# Altium PCB Template2.PcbDoc (part 1 of 2)
Units mm, origin at the board's own origin, x right, y up, seen from the top; angles counter-clockwise.
Board outline 69.9 x 99.85 mm, 4 copper layers (Top Layer, InternalGND, Internal3V3, Bottom Layer), stack 1.563 mm thick; 143 components, 104 nets, 478 pads, 688 vias.
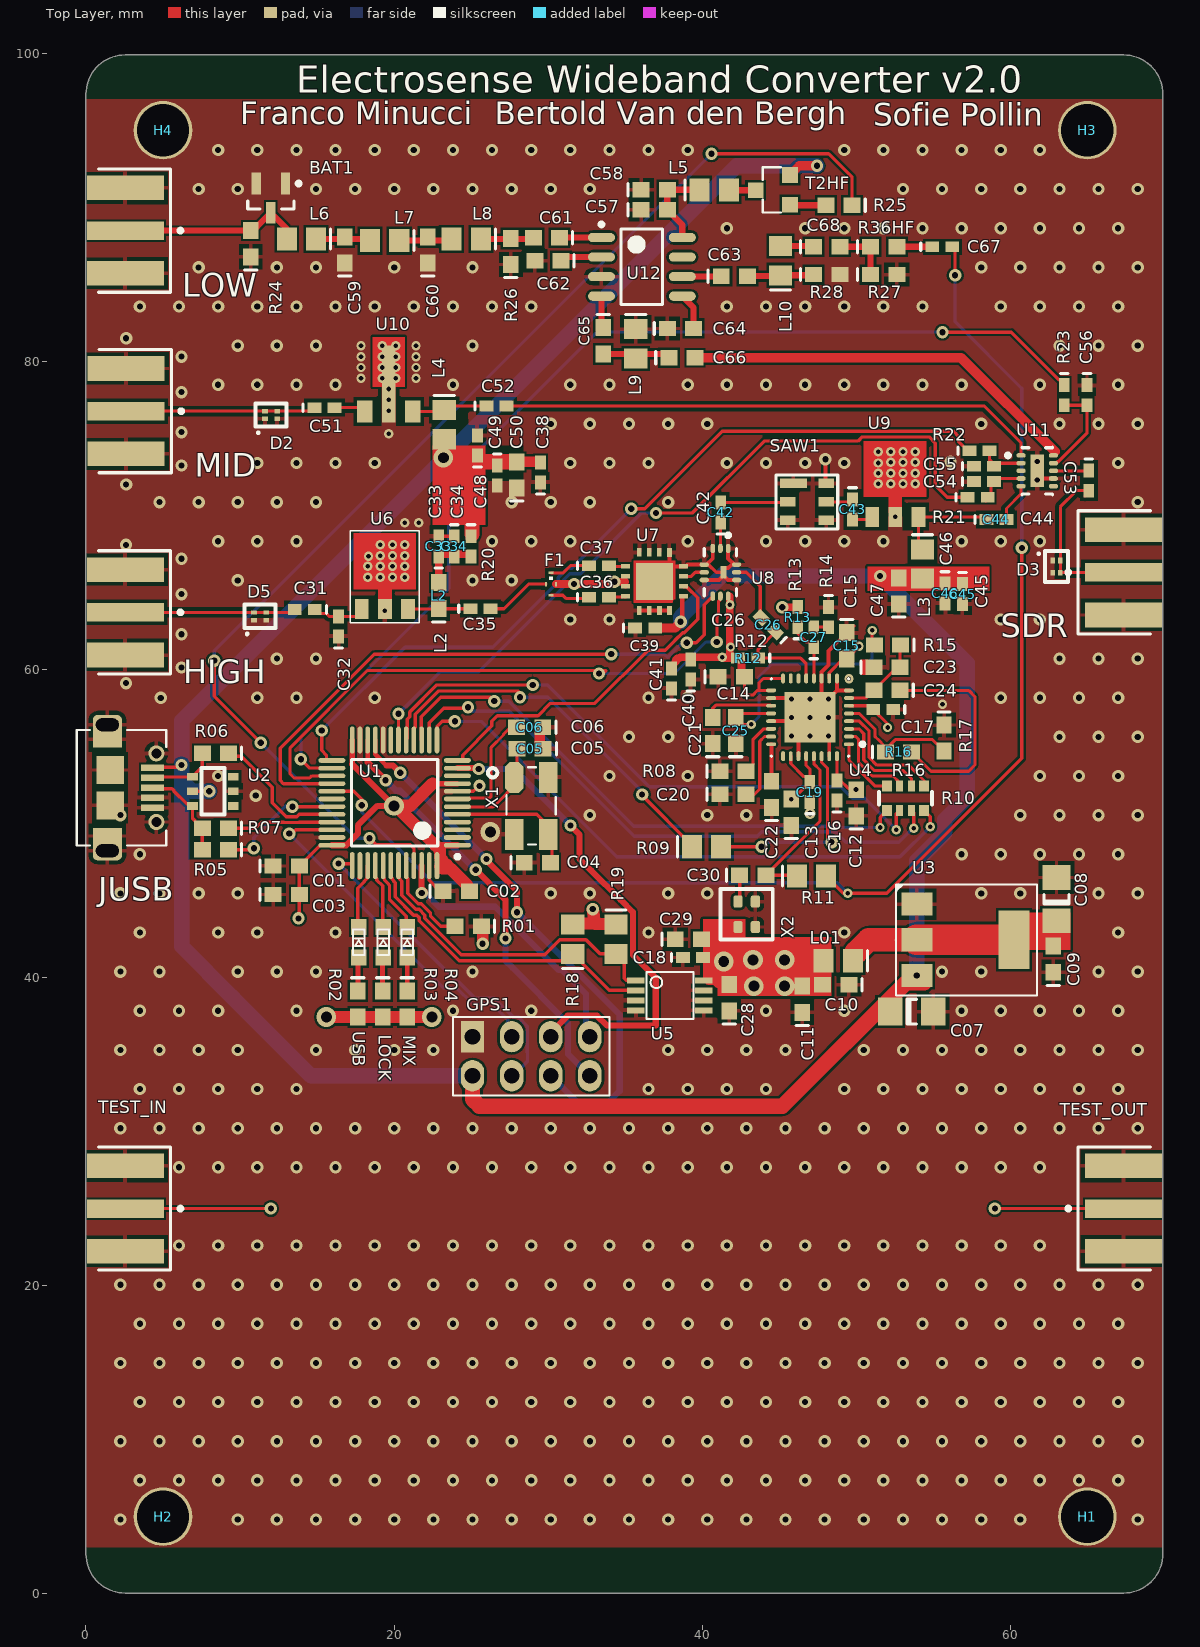
[diagram p0: Top Layer view]
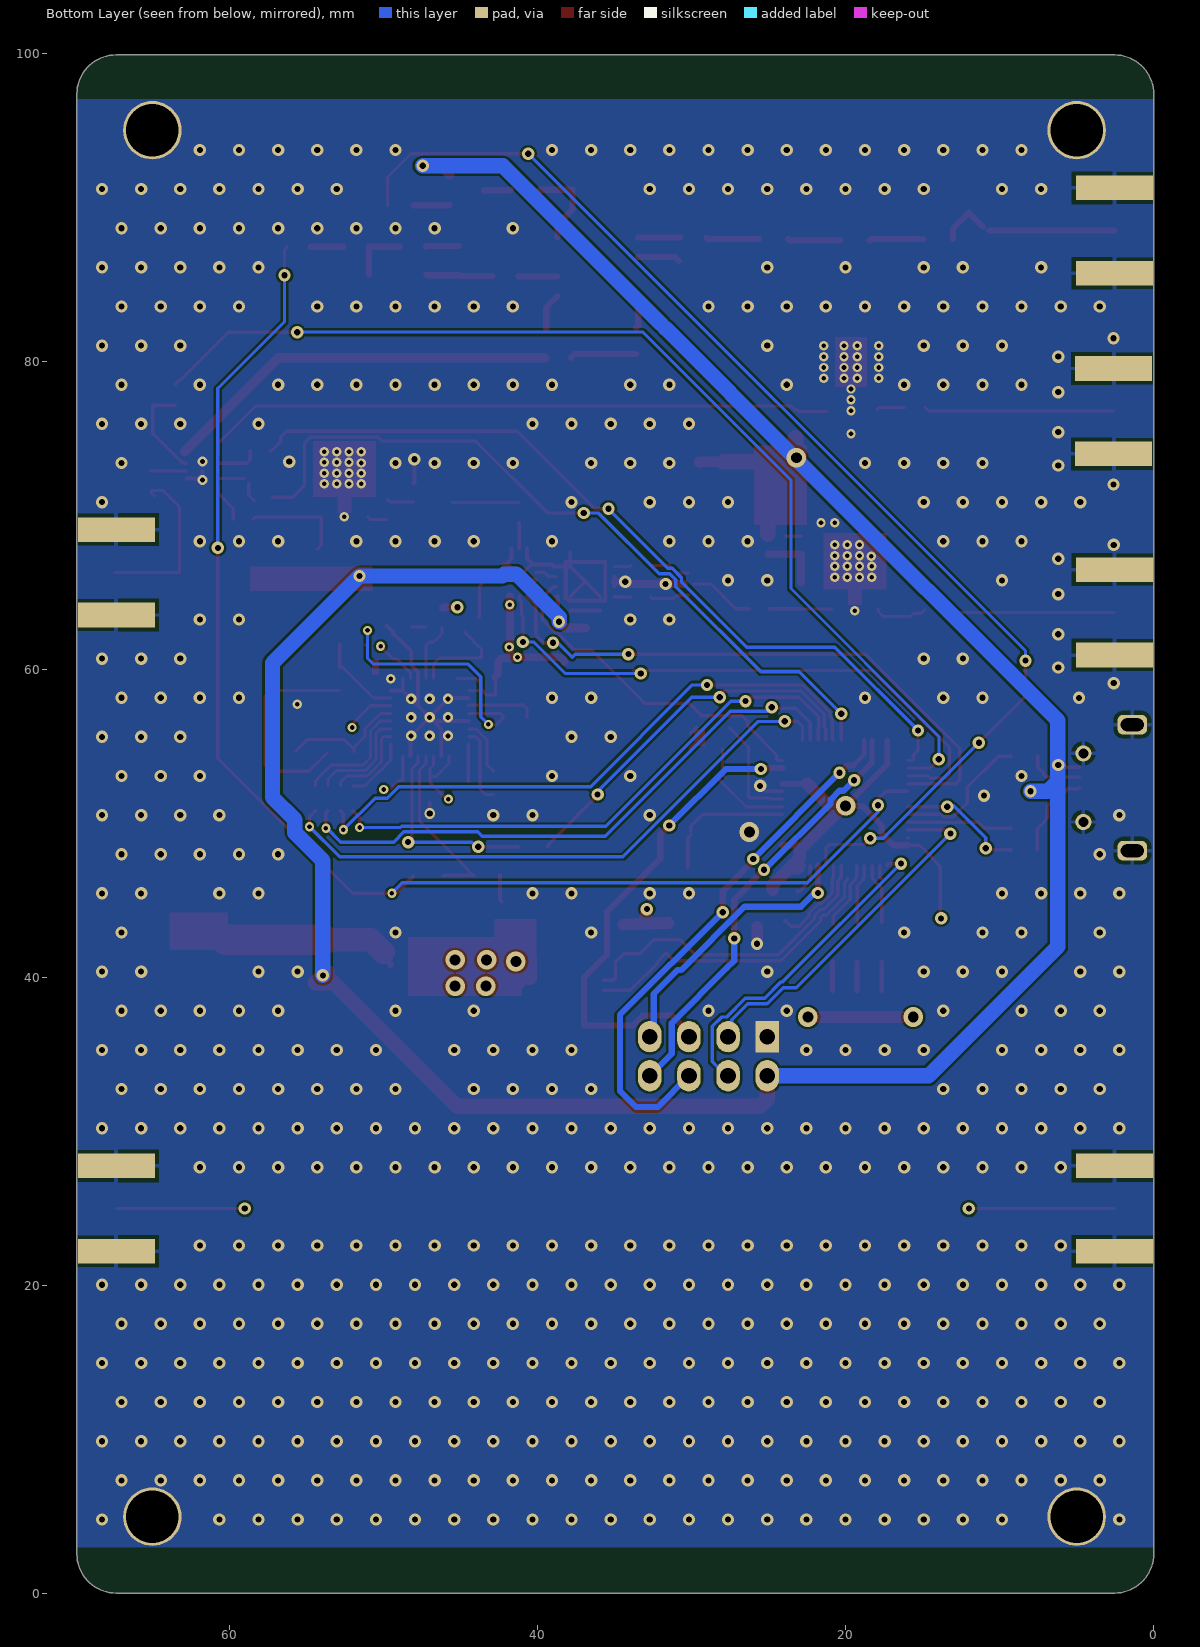
[diagram p1: Bottom Layer view, seen from below]
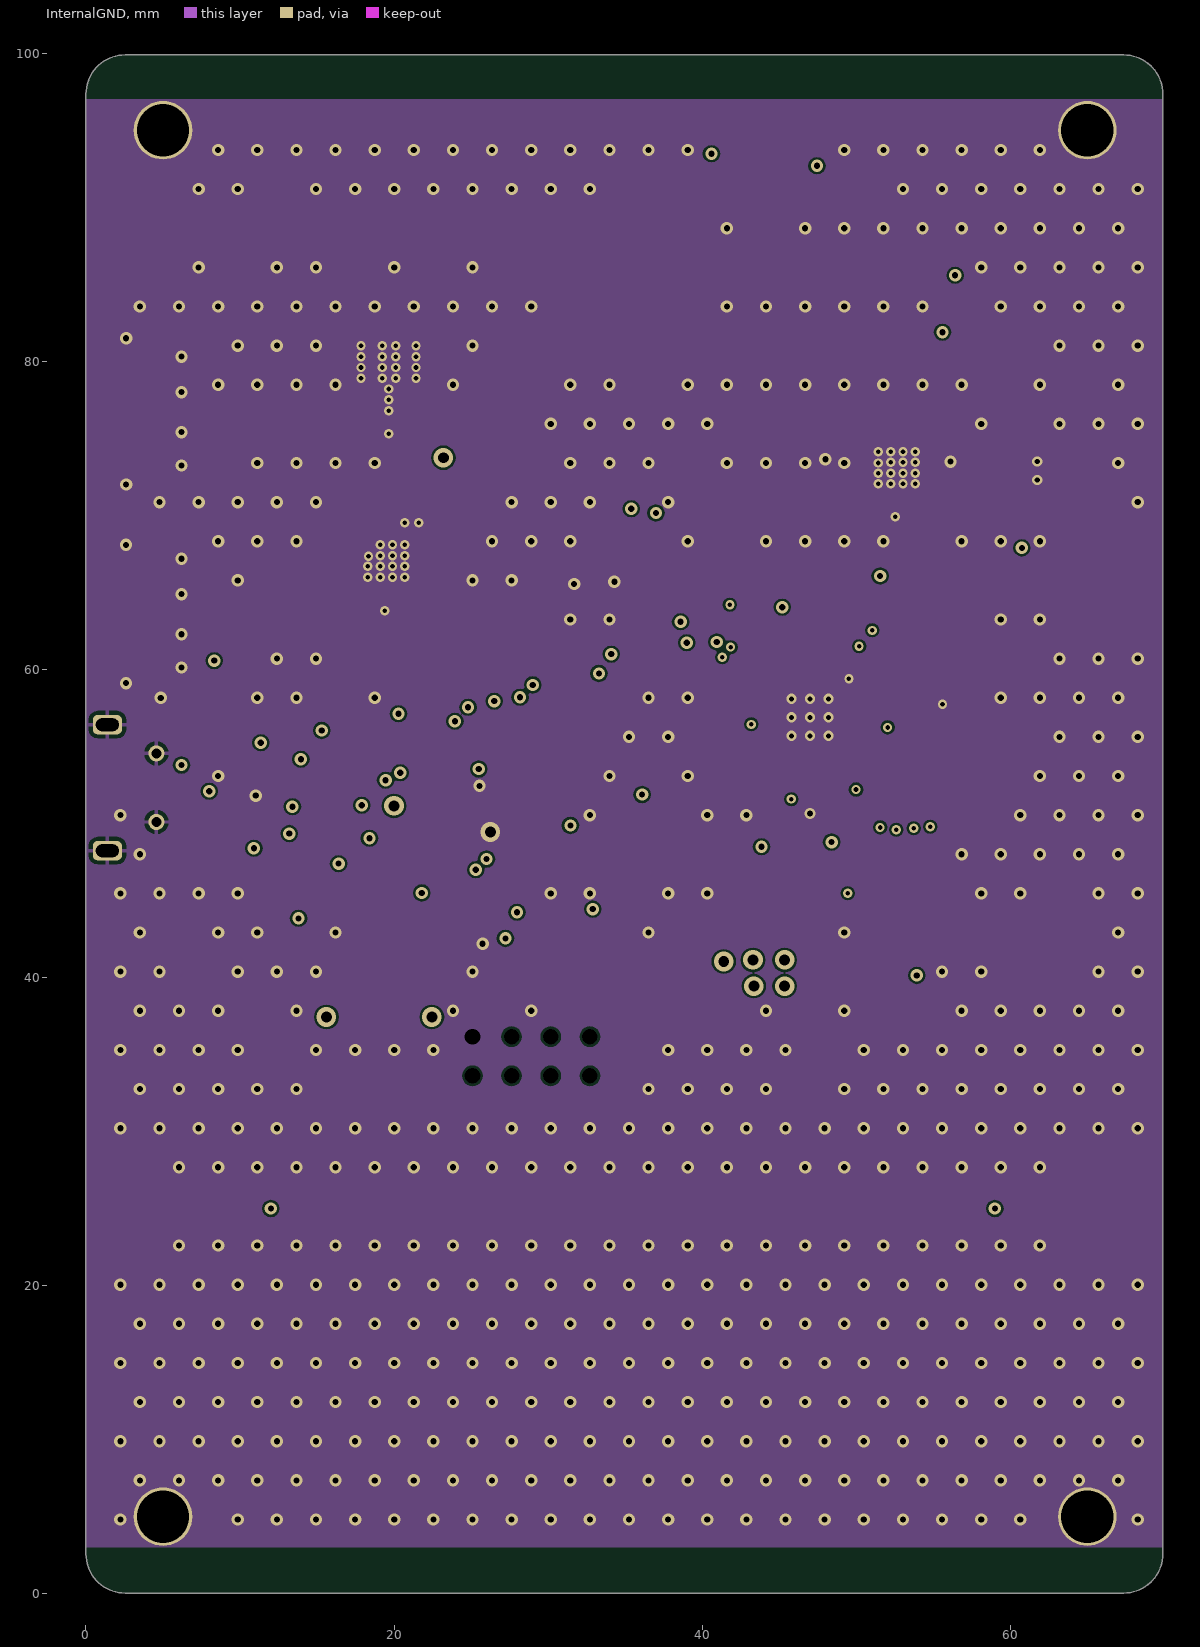
[diagram p2: InternalGND]
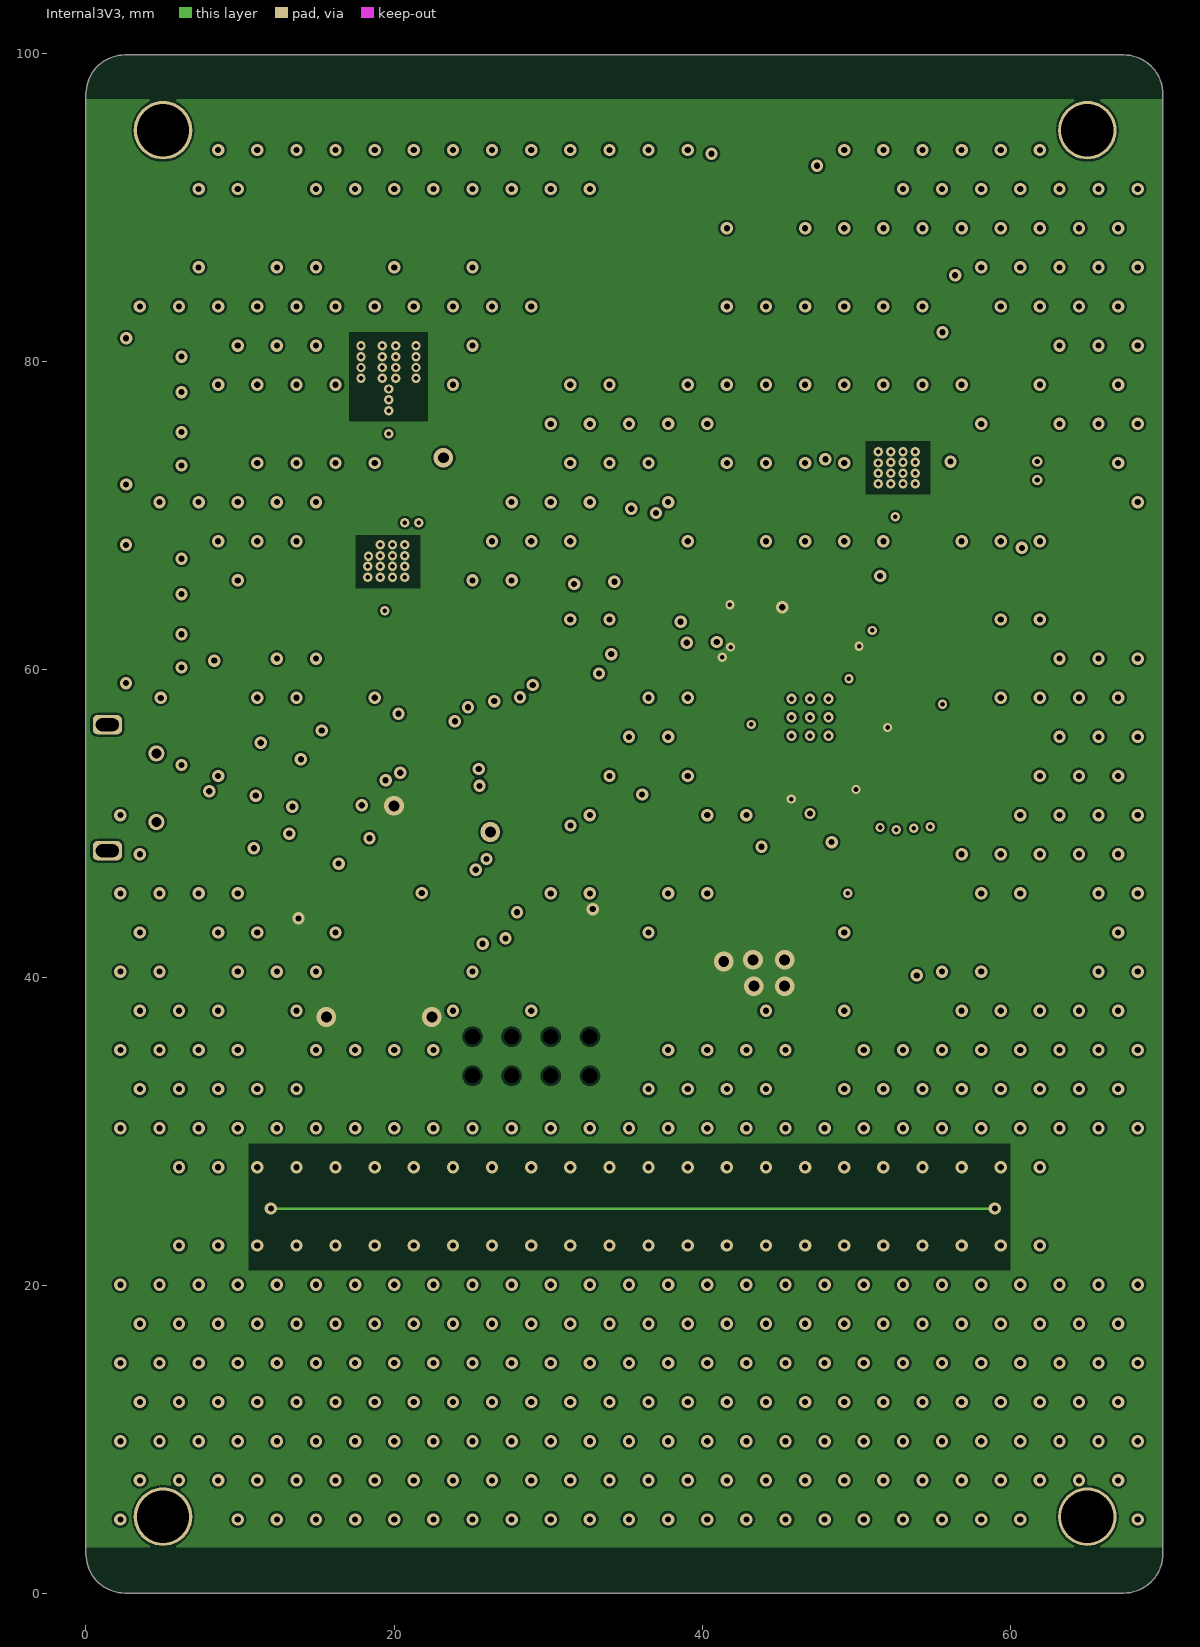
[diagram p3: Internal3V3]

## Layer stack, top to bottom
Top Solder: solder mask 0.0102, Solder Resist, Dk 3.5
Top Layer: signal copper 0.0356
Dielectric1: core 0.11, FR-4, Dk 4.29
InternalGND: signal copper 0.036
Dielectric5: prepreg 1.2, FR-4, Dk 3.96
Internal3V3: signal copper 0.036
Dielectric6: core 0.11, FR-4, Dk 4.29
Bottom Layer: signal copper 0.0356
Bottom Solder: solder mask 0.0102, Solder Resist, Dk 3.5

## Board outline
0,97.349 cw(c2.54,97.349) 2.54,99.889 67.36,99.889 cw(c67.36,97.349) 69.9,97.349 69.9,2.579 cw(c67.36,2.579) 67.36,0.039 2.54,0.039 cw(c2.54,2.579) 0,2.579

## Design rules (kind name [scope] priority, off if disabled: settings)
Clearance Clearance_1 [(InPolygon) vs InNetClass('RF')] p1: gap=0.25 ignorepadtopadclearanceinfootprint=FALSE except(0: Arc-Hole Track-Hole SMDPad-Hole THPad-Hole Via-Hole Fill-Hole Poly-Hole Region-Hole Text-Hole)
Clearance [All] p2: gap=0.15 ignorepadtopadclearanceinfootprint=FALSE except(0: Arc-Hole Track-Hole SMDPad-Hole THPad-Hole Via-Hole Fill-Hole Poly-Hole Region-Hole Text-Hole)
DiffPairsRouting [(InDifferentialPairClass('All Differential Pairs'))] p1: maxlimit=0.254 minlimit=0.254 mostfreqgap=0.254 toplayer_minwidth=0.381 toplayer_maxwidth=0.381 toplayer_prefwidth=0.381 midlayer1_minwidth=0.381 midlayer1_maxwidth=0.381 midlayer1_prefwidth=0.381 midlayer2_minwidth=0.381 midlayer2_maxwidth=0.381 midlayer2_prefwidth=0.381 bottomlayer_minwidth=0.381 bottomlayer_maxwidth=0.381 bottomlayer_prefwidth=0.381 maxuncoupledlength=12.7
HoleSize [All] p1: absolutevalues=TRUE maxlimit=3.5 minlimit=0.025 maxpercent=80.000 minpercent=20.000
MinimumAnnularRing [All] p1: minimumring=0.125
MinimumSolderMaskSliver [All] p1: minsoldermaskwidth=0
PlaneClearance [All] p1: clearance=0.2
PlaneConnect [All] p1: planeconnectstyle=Direct reliefexpansion=0.508 reliefentries=4 reliefconductorwidth=0.254 reliefairgap=0.254
PolygonConnect PolygonConnect_1 [(InPadClass('Direct') or isVia) vs InNet('GND')] p1: connectstyle=Direct reliefconductorwidth=0.254 reliefentries=4 polygonreliefangle="90 Angle" airgapwidth=0.254
PolygonConnect [All] p2: connectstyle=Relief reliefconductorwidth=0.254 reliefentries=4 polygonreliefangle="90 Angle" airgapwidth=0.254
RoutingLayers [All] p1: top layer_v5=TRUE mid layer 1_v5=FALSE mid layer 2_v5=FALSE bottom layer_v5=TRUE
RoutingVias [All] p1: holewidth=0.4 width=0.8 viastyle="Through Hole" minholewidth=0.25 minwidth=0.6 maxholewidth=2 maxwidth=2.5
SilkToSilkClearance [All] p1 off: silktosilkclearance=0.254
SilkToSolderMaskClearance SilkscreenOverComponentPads [IsPad] p1 off: minsilkscreentomaskgap=0.254 clearancetoexposedcopper=TRUE
SolderMaskExpansion [All] p1: expansion=0 istentingtop=FALSE
Width [InNetClass('RF')] p1: maxlimit=0.2 minlimit=0.098 preferedwidth=0.2 toplayer_minwidth=0.2 midlayer1_maxwidth=0.098 midlayer1_prefwidth=0.098 midlayer2_maxwidth=0.098 midlayer2_prefwidth=0.098 bottomlayer_minwidth=0.2 impedanceprofiledriven=TRUE impedanceprofileid={D2337405-BB80-458E-8EDF-B68371DB91AB} impedanceprofilevalue=50.000000 minimp=50.000000 maximp=50.000000 favimp=50.000000
Width Width_1 [All] p2: maxlimit=2.54 minlimit=0.16 preferedwidth=0.254 minimp=50.000000 maximp=50.000000 favimp=50.000000
22 further rules are at their usual default settings.

## Classes and differential pairs
component class Toplevel: H1 H2 H3 H4 R03
net class RF: DOWNCONV_IN HIGH1 HIGH2 HIGH3 HIGH4 HIGH5 HIGH6 HIGH7 HIGH8 HIGH9 HIGH10 IMG_F_HIGH IMG_F_LOW LO+ LO- MID1 MID2 MID3 MID_IN OUT1 OUT2 RFOUTA+ RFOUTA-
component class U_CPU: C01 C02 C03 C04 C05 C06 C07 C08 C09 C10 C11 C11CPU GPS1 JUSB L01 LOCK MIX R01 R02 R02CPU R03 R03CPU R04 R04CPU R05 R06 R07 R07CPU R08CPU U1 U2 U3 X1
component class U_LO: C7 C12 C13 C14 C15 C16 C17 C18 C018LO C19 C019LO C20 C020LO C21 C22 C23 C24 C25 C26 C27 C28 C29 C30 R1 R2 R3 R4 R5 R6 R08 R9 R09 R10 R11 R011LO R12 R13 R14 R15 R16 R17 R18 R19 R039LO R040LO R041LO U4 U5 X2
component class U_MixerHF: BAT1 C57 C58 C59 C60 C61 C62 C63 C65 C66 C67 C68 C73HF C75HF C76HF C78HF C79HF C80HF C81HF C82HF C83HF C84HF L5 L6 L6HF L7 L7HF L8 L8HF L9 L9HF L10 L10HF LOW R24 R25 R26 R27 R28 R36HF T2HF U12
component class U_Mixer: C31 C32 C33 C34 C35 C36 C37 C38 C39 C40 C41 C42 C43 C44 C45 C46 C47 C48 C49 C50 C51 C52 C53 C54 C55 C56 C70 C71 C72 C102 C103 D2 D3 D5 F1 HIGH L2 L3 L4 MID R20 R21 R22 R23 R30 R32 SAW1 SDR U6 U7 U8 U9 U10 U11
pad class Direct: BAT1-1 BAT1-2 BAT1-3 C49-1 C49-2 C50-1 C50-2 C51-1 C51-2 C52-1 C52-2 C56-1 C56-2 C59-1 C59-2 C60-1 C60-2 C67-1 C67-2 C70-1 C70-2 C71-1 C71-2 C72-1 C72-2 D3-1 D3-2 D3-3 D3-4 D5-1 D5-2 D5-3 D5-4 GPS1-1 GPS1-2 GPS1-3 GPS1-4 GPS1-5 GPS1-6 GPS1-7 GPS1-8 H1-0 H2-0 H3-0 H4-0 HIGH-1 HIGH-2 HIGH-3 HIGH-4 HIGH-5 L4-1 L4-2 LOCK-1 LOCK-2 LOW-1 LOW-2 LOW-3 LOW-4 LOW-5 MIX-1 MIX-2 R28-1 R28-2 R30-1 R30-2 R32-1 R32-2 SDR1-1 SDR1-2 SDR1-3 SDR1-4 SDR1-5 U1-1 U1-2 U1-3 U1-4 U1-5 U1-6 U1-7 U1-8 U1-9 U1-10 U1-11 U1-12 U1-13 U1-14 U1-15 U1-16 U1-17 U1-18 U1-19 U1-20 U1-21 U1-22 U1-23 U1-24 U1-25 U1-26 U1-27 U1-28 U1-29 U1-30 U1-31 U1-32 U1-33 U11-1 U11-2 U11-3 U20-1 U20-2 U20-3 USB-1 USB-2

## Components (designator, comment, footprint, x,y, rotation, side; value= is the part's Value field where it differs from the comment)
BAT1 "BAT1704WH6327XTSA1" SOT95P230X110-3N 12,90.589 r270 top
C01 "100nF" "smd C0603_0.80" 13,47.239 r0 top
C02 "100nF" "smd C0603_0.80" 24.033,45.609 r0 top
C03 "100nF" "smd C0603_0.80" 13,45.389 r0 top
C04 "10pF" "smd C0603_0.80" 29.3,47.439 r0 top
C05 "10pF" "smd C0603_0.80" 28.83,54.839 r180 top
C06 "100nF" "smd C0603_0.80" 28.8,56.239 r180 top
C07 "10uF" "smd C1206 polar" 53.6,37.789 r0 top
C08 "10uF" "smd C1206 polar" 63,45.089 r90 top
C09 "100nF" "smd C0603_0.80" 62.8,41.189 r90 top
C10 "100nF" "smd C0603_0.80" 48.673,39.539 r180 top
C11 "10nF" "smd C0603_0.80" 46.5,38.589 r90 top
C12 "100nF" "smd C0603_0.80" 50,51.339 r90 top
C13 "100nF" "smd C0603_0.80" 45.786,50.731 r90 top
C14 "100nF" "smd C0603_0.80" 41.886,59.531 r0 top
C15 "100nF" "smd C0603_0.80" 49.386,61.531 r270 top
C16 "10nF" "smd C0402" 48.75,52.139 r90 top
C17 "10nF" "smd C0402" 51.75,57.389 r180 top
C18 "10nF" "smd C0402" 39.4,41.298 r0 top
C19 "10nF" "smd C0402" 46.986,52.031 r90 top
C20 "1uF" "smd C0603_0.80" 42,51.889 r0 top
C21 "1uF" "smd C0603_0.80" 40.686,56.031 r90 top
C22 "1uF" "smd C0603_0.80" 44.5,51.889 r90 top
C23 "12nF" "smd C0603_0.80" 52,60.139 r0 top
C24 "100nF" "smd C0603_0.80" 52,58.639 r180 top
C25 "820pF" "smd C0603_0.80" 42.186,56.031 r90 top
C26 "22pF" "smd C0402" 44.3,62.896 r135 top
C27 "22pF" "smd C0402" 47.236,62.089 r90 top
C28 "100nF" "smd C0603_0.80" 41.75,38.689 r90 top
C29 "100nF" "smd C0603_0.80" 39.101,42.489 r0 top
C30 "100nF" "smd C0603_0.80" 43.286,46.639 r0 top
C31 "22pF" "smd C0402" 14.2,63.889 r180 top
C32 "" "smd C0402" 16.4,62.789 r90 top
C33 "CSMD402/1nF" "smd C0402" 22.9,67.989 r90 top
C34 "100nF" "smd C0402" 23.909,67.989 r270 top
C35 "22pF" "smd C0402" 25.6,63.939 r0 top
C36 "22pF" "smd C0402" 33.3,64.689 r0 top
C37 "22pF" "smd C0402" 33.3,66.734 r0 top
C38 "100nF" "smd C0402" 29.5,72.789 r90 top
C39 "47pF" "smd C0402" 36.3,62.689 r0 top
C40 "10nF" "smd C0402" 39.263,59.989 r90 top
C41 "100nF" "smd C0402" 38,59.414 r90 top
C42 "100pF" "smd C0402" 41.2,70.189 r90 top
C43 "CSMD402/100nF" "smd C0402" 49.761,70.389 r270 top
C44 "CSMD402/100nF" "smd C0402" 59.1,69.739 r0 top
C45 "CSMD402/100pF" "smd C0402" 56.9,64.889 r270 top
C46 "CSMD402/1.5nF" "smd C0402" 55.769,64.939 r270 top
C47 "1uF" "smd C0603_0.80" 52.764,65.089 r90 top
C48 "CSMD402/100pF" "smd C0402" 25.411,74.539 r90 top
C49 "CSMD402/1.5nF" "smd C0402" 26.7,72.589 r270 top
C50 "1uF" "smd C0603_0.80" 27.95,72.626 r90 top
C51 "CSMD402/100nF" "smd C0402" 15.49,76.989 r0 top
C52 "CSMD402/100nF" "smd C0402" 26.639,77.089 r0 top
C53 "100pF" "smd C0402" 65.1,72.25 r270 top
C54 "47pF" "smd C0402" 58.3,72.189 r0 top
C55 "47pF" "smd C0402" 58.3,73.189 r0 top
C56 "47pF" "smd C0402" 64.978,77.8 r270 top
C57 "10nF" "smd C0603_0.80" 36.886,89.831 r0 top
C58 "100nF" "smd C0603_0.80" 36.886,91.131 r0 top
C59 "47pF" "smd C0603_0.80" 16.786,87.231 r90 top
C60 "47pF" "smd C0603_0.80" 22.186,87.231 r90 top
C61 "10nF" "smd C0603_0.80" 29.886,88.031 r180 top
C62 "10nF" "smd C0603_0.80" 29.986,86.531 r180 top
C63 "10nF" "smd C0603_0.80" 42.086,85.531 r0 top
C64 "47pF" "smd C0603_0.80" 38.586,82.131 r0 top
C65 "47pF" "smd C0603_0.80" 33.586,81.331 r270 top
C66 "" "smd C0603_0.80" 38.686,80.231 r0 top
C67 "47pF" "smd C0402" 55.586,87.431 r0 top
C68 "" "smd C0603_0.80" 48.086,87.431 r0 top
D2 "ESD0P8RFL" ESD0P8RFL 12.013,76.514 r270 top
D3 "ESD0P8RFL" ESD0P8RFL 63,66.677 r180 top
D5 "ESD0P8RFL" ESD0P8RFL 11.3,63.447 r270 top
F1 "DPX165850DT-8017A1" DPX165850DT-8017A1 29.786,66.339 r270 top
GPS1 "" "hdr 2x4" 28.9,34.889 r0 top
H1 "MOUNTHOLE_3MM" MOUNT_3MM#1 90.5,34.889 r0 top
H2 "MOUNTHOLE_3MM" MOUNT_3MM#2 5,34.889 r0 top
H3 "MOUNTHOLE_3MM" MOUNT_3MM#3 90.5,94.889 r0 top
H4 "MOUNTHOLE_3MM" MOUNT_3MM#4 7.6,96.989 r0 top
HIGH "CON-SMA-EDGE-S" FP-CON-SMA-EDGE-S-MFG -4.7,63.7 r90 top
JUSB "CON SMD USB Micro MOLEX" "SMD USB MOLEX" 0.12,52.32 r0 top
L01 "Ferrite" "smd C0805" 48.827,41.089 r180 top
L2 "SPL603/51nH" "smd C0603" 22.9,64.789 r90 top
L3 "SPL805/470nH" "smd C0805" 54.3,66.839 r270 top
L4 "SPL805/470nH" "smd C0805" 23.259,75.889 r270 top
L5 "Ferrite" "smd C0805" 40.786,91.131 r0 top
L6 "470nH" "smd C0805" 13.986,87.931 r180 top
L7 "470nH" "smd C0805" 19.386,87.831 r180 top
L8 "470nH" "smd C0805" 24.686,87.931 r180 top
L9 "470nH" "smd C0805" 35.686,81.131 r270 top
L10 "470nH" "smd C0805" 45.086,86.531 r90 top
LOCK "HSMG-C190" "led HSMH-C190 (Avago Technologies)" 19.3,42.289 r90 top
LOW "CON-SMA-EDGE-S" FP-CON-SMA-EDGE-S-MFG -4.7,88.484 r90 top
MID "CON-SMA-EDGE-S" FP-CON-SMA-EDGE-S-MFG -4.654,76.764 r90 top
MIX "HSMY-C190" "led HSMH-C190 (Avago Technologies)" 20.854,42.289 r90 top
R01 "1K5" "smd C0603_0.45" 24.817,43.339 r180 top
R02 "750" "smd C0603_0.45" 17.654,38.285 r270 top
R03 "750" "smd C0603_0.45" 19.254,38.285 r270 top
R04 "750" "smd C0603_0.45" 20.854,38.285 r270 top
R05 "1K5" "smd C0603_0.45" 8.4,48.289 r180 top
R06 "51" "smd C0603_0.45" 8.4,54.564 r180 top
R07 "51" "smd C0603_0.45" 8.4,49.689 r180 top
R08 "5K1" "smd C0603_0.45" 42,53.389 r0 top
R09 "270" "smd C0805_0.50" 40.286,48.489 r0 top
R10 "" "smd R EXB38v" 53.2,51.639 r0 top
R11 "" "smd C0805_0.50" 47.1,46.589 r0 top
R12 "50R/402" "smd C0402_0.35" 42.986,60.731 r180 top
R13 "50R/402" "smd C0402_0.35" 46.2,63.389 r90 top
R14 "50R/402" "smd C0402_0.35" 48.2,63.389 r270 top
R15 "240" "smd C0603_0.45" 52.036,61.581 r180 top
R16 "" "smd C0603_0.45" 52.75,54.639 r0 top
R17 "91" "smd C0603_0.45" 55.7,55.539 r270 top
R18 "" "smd C0805_0.50" 31.6,42.489 r90 top
R19 "" "smd C0805_0.50" 34.4,42.489 r270 top
R20 "20R/402" "smd C0402_0.35" 25,67.989 r270 top
R21 "51" "smd C0402_0.35" 57.883,71.178 r0 top
R22 "51" "smd C0402_0.35" 58,74.189 r0 top
R23 "51" "smd C0402_0.35" 63.5,77.8 r270 top
R24 "10K" "smd C0603_0.45" 10.7,87.631 r90 top
R25 "10K" "smd C0603_0.45" 48.886,90.131 r180 top
R26 "51" "smd C0603_0.45" 27.586,87.131 r90 top
R27 "51" "smd C0603_0.45" 51.786,85.631 r0 top
R28 "51" "smd C0603_0.45" 48.086,85.631 r0 top
R36HF "390" "smd C0603_0.45" 51.786,87.431 r0 top
SAW1 "BR39162B3522U410" SAW_package 46.797,70.876 r90 top
SDR "CON-SMA-EDGE-S" FP-CON-SMA-EDGE-S-MFG 74.6,66.3 r270 top (schematic designator SDR1)
T2HF "BC856" "smd SOT-23" 44.586,91.131 r90 top
TEST_IN "CON-SMA-EDGE-S" FP-CON-SMA-EDGE-S-MFG -4.7,25 r90 top
TEST_OUT "CON-SMA-EDGE-S" FP-CON-SMA-EDGE-S-MFG 74.6,25 r270 top
U1 "STM32F103C8T6" TSQFP50P900X900X160-48N 20.036,51.339 r180 top
U2 "IP4220CZ6" "smd SOT-457" 8.24,52.089 r90 top
U3 "LD1117-SOT223" SOT223 56.65,42.449 r270 top
U4 "MAX2870" MAXIM-T3255 47,56.889 r180 top
U5 "MCP9804" "smd MSOP/8" 37.9,38.839 r270 top
U6 "SBB3089Z" LFCSP#1 19.4,66.339 r0 top
U7 "SKY13286-359LF" QFN-16_skyworks 36.9,65.714 r180 top
U8 "LTC5549" LTC5549 41.186,66.304 r270 top
U9 "ADL5602" LFCSP#1 52.536,72.328 r0 top
U10 "ADL5602" LFCSP#2 19.65,79.239 r0 top
U11 "SKY13322-375LF" QFN50P200X300X80-10N 61.75,72.889 r0 top
U12 "SA612" SOIC127P600X175-8N 36.086,86.131 r0 top
USB "HSMH-C190" "led HSMH-C190 (Avago Technologies)" 17.7,42.289 r90 top
X1 "KTL/5x3.2mm16MHz" "smd KTL 5x3.2" 27.8,52.989 r270 top
X2 "X1G004691000112" X1G004691000112 42.885,44.105 r90 top

## Footprints (in the part's own frame and the unit in brackets; to place one, negate y for a bottom-side part, rotate by r counter-clockwise, add the part's x,y. Pads: shape width x height; smd on the part's side, far side on the other; paste and mask are expansions set on the pad)
DPX165850DT-8017A1 [mm] "Multilayer Diplexer"
  rect 0.15x0.3 smd: 1(0.075,0.4) 3(1.525,0.4)
  rect 0.3x0.15 smd: 2(0.8,0.075) 4(0.8,0.725)
  silkscreen extent 0.3,0.28 0.55,0.53
ESD0P8RFL [mm]
  rect 0.28x0.38 smd: 1(0.25,-0.4) 2(0.25,0.4) 3(-0.25,0.4) 4(-0.25,-0.4)
  silkscreen extent -0.76,-1 1.17,1
FP-CON-SMA-EDGE-S-MFG [mm]
  rect 1.2x5 smd paste+0 mask+0: 1(0,-7.26)
  rect 1.6x5 smd paste+0 mask+0: 2(-2.77,-7.26) 3(2.77,-7.26)
  rect 1.6x5 smd far side paste+0 mask+0: 4(-2.77,-7.26) 5(2.77,-7.26)
  silkscreen extent -4,-10.96 4,-5.5, body extent -3.67,-9.86 3.67,4.86, height 0.25
"hdr 2x4" [mil]
  rect 60x80 / inner round 0 / far side rect 60x80 hole 40 paste+0 mask+0: 1(-150,50)
  oval 60x80 / inner round 0 / far side oval 60x80 hole 40 paste+0 mask+0: 2(-150,-50) 3(-50,50) 4(-50,-50) 5(50,50) 6(50,-50) 7(150,50) 8(150,-50)
  silkscreen extent -200,-100 200,100
"led HSMH-C190 (Avago Technologies)" [mil]
  rect 40x40 smd paste+0 mask+0: 1(-39,0) 2(39,0)
  silkscreen extent -33,-15 32,15
LFCSP#1 [mm]
  rect 0.9x1.3 smd: 1(-1.5,-2.425) 2(0,-2.425) 3(1.5,-2.425)
  Top Layer region: -2.05,-1.15 2.025,-1.15 2.025,2.5 -2.05,2.5
  Top Layer region: -0.45,-2.175 0.45,-2.175 0.45,-1.075 -0.45,-1.075
  silkscreen extent -2.25,-3.3 2.22,2.65
LFCSP#2 [mm]
  rect 1x1.4 smd: 1(-1.55,-2.5) 3(1.55,-2.5)
  rect 0.9x5 smd: 2(0,-0.7)
  Top Layer region: -1.05,-0.9 1.05,-0.9 1.05,2.35 -1.05,2.35
LTC5549 [mm] "QFN, 12-Leads, Body 2,1x3,1mm (max), Pitch 0,50mm, IPC Medium Density"
  oval 0.6x0.3 smd: 1(-1.55,0.5) 2(-1.55,0) 3(-1.55,-0.5) 7(1.55,-0.5) 8(1.55,0) 9(1.55,0.5)
  oval 0.3x0.6 smd: 4(-0.5,-1.05) 5(0,-1.05) 6(0.5,-1.05) 10(0.5,1.05) 11(0,1.05) 12(-0.5,1.05)
  rect 0.8x0.4 smd: 13(0,0.2)
  silkscreen extent -2.52,-1.05 1.55,1.05, body extent -1.55,-1.05 1.55,1.05, height 0.8
MAXIM-T3255 [mm] "QFN, 32-Leads, Body 5,0x5,0mm (max), Pitch 0,50mm, IPC Medium Density"
  oval 0.65x0.25 smd: 1(-2.525,1.75) 2(-2.525,1.25) 3(-2.525,0.75) 4(-2.525,0.25) 5(-2.525,-0.25) 6(-2.525,-0.75) 7(-2.525,-1.25) 8(-2.525,-1.75) 17(2.525,-1.75) 18(2.525,-1.25) 19(2.525,-0.75) 20(2.525,-0.25) 21(2.525,0.25) 22(2.525,0.75) 23(2.525,1.25) 24(2.525,1.75)
  oval 0.25x0.65 smd: 9(-1.75,-2.525) 10(-1.25,-2.525) 11(-0.75,-2.525) 12(-0.25,-2.525) 13(0.25,-2.525) 14(0.75,-2.525) 15(1.25,-2.525) 16(1.75,-2.525) 25(1.75,2.525) 26(1.25,2.525) 27(0.75,2.525) 28(0.25,2.525) 29(-0.25,2.525) 30(-0.75,2.525) 31(-1.25,2.525) 32(-1.75,2.525)
  rect 3.3x3.3 smd: 33(0,0)
  silkscreen extent -3.53,-2.52 2.52,2.53, body extent -2.5,-2.5 2.5,2.5, height 1
MOUNT_3MM#1 [mm]
  round 3.8 hole 3.4 paste-100 mask-100: 0(-25.5,-29.889)
MOUNT_3MM#2 [mm]
  round 3.8 hole 3.4 paste-100 mask-100: 0(0,-29.889)
MOUNT_3MM#3 [mm]
  round 3.8 hole 3.4 paste-100 mask-100: 0(-25.5,0.111)
MOUNT_3MM#4 [mm]
  round 3.8 hole 3.4 paste-100 mask-100: 0(-2.6,-1.989)
QFN50P200X300X80-10N [mm] "QFN, 10-Leads, Body 3,0x2,0mm (max), Pitch 0,50mm, IPC Medium Density"
  oval 0.6x0.3 smd: 1(-1.05,1) 2(-1.05,0.5) 3(-1.05,0) 4(-1.05,-0.5) 5(-1.05,-1) 6(1.05,-1) 7(1.05,-0.5) 8(1.05,0) 9(1.05,0.5) 10(1.05,1)
  rect 0.9x2.1 smd: 11(0,0)
  silkscreen extent -2.02,-1.55 1,1.55, body extent -1,-1.5 1,1.5, height 0.8
QFN-16_skyworks [mm]
  rect 0.575x0.3 smd: 1(-1.887,0.975) 2(-1.887,0.324) 3(-1.887,-0.325) 4(-1.887,-0.975) 9(1.887,-0.975) 10(1.887,-0.325) 11(1.887,0.327) 12(1.889,0.975)
  rect 0.3x0.575 smd: 5(-0.975,-1.886) 6(-0.325,-1.888) 7(0.325,-1.888) 8(0.975,-1.888) 13(0.975,1.889) 14(0.325,1.889) 15(-0.326,1.887) 16(-0.975,1.888)
  rect 2.4x2.4 smd: 17(0,0)
  Top Layer region: -1.15,1.125 1.35,1.125 1.35,1.35 -1.15,1.35
  Top Layer region: 1.175,-1.35 1.35,-1.35 1.35,1.125 1.175,1.125
  Top Layer region: -1.35,-1.35 1.175,-1.35 1.175,-1.125 -1.35,-1.125
  Top Layer region: -1.35,-1.225 -1.125,-1.225 -1.125,1.15 -1.35,1.15
  Top Layer region: -1.306,1.15 -1.19,1.15 -1.19,1.156 -1.306,1.156
  Top Layer region: -1.289,1.154 -1.188,1.154 -1.188,1.162 -1.289,1.162
  Top Layer region: -1.269,1.157 -1.182,1.157 -1.182,1.169 -1.269,1.169
  Top Layer region: -1.257,1.166 -1.175,1.166 -1.175,1.175 -1.257,1.175
  Top Layer region: -1.245,1.173 -1.181,1.173 -1.181,1.181 -1.245,1.181
  Top Layer region: -1.24,1.178 -1.185,1.178 -1.185,1.185 -1.24,1.185
  Top Layer region: -1.231,1.183 -1.19,1.183 -1.19,1.191 -1.231,1.191
  Top Layer region: -1.223,1.187 -1.193,1.187 -1.193,1.195 -1.223,1.195
  Top Layer region: -1.219,1.187 -1.187,1.187 -1.187,1.202 -1.219,1.202
  Top Layer region: -1.213,1.197 -1.149,1.197 -1.149,1.209 -1.213,1.209
  Top Layer region: -1.205,1.201 -1.124,1.201 -1.124,1.214 -1.205,1.214
  Top Layer region: -1.198,1.203 -1.119,1.203 -1.119,1.223 -1.198,1.223
  Top Layer region: -1.192,1.214 -1.127,1.214 -1.127,1.231 -1.192,1.231
  Top Layer region: -1.184,1.22 -1.131,1.22 -1.131,1.24 -1.184,1.24
  Top Layer region: -1.18,1.229 -1.131,1.229 -1.131,1.247 -1.18,1.247
  Top Layer region: -1.178,1.235 -1.13,1.235 -1.13,1.251 -1.178,1.251
  Top Layer region: -1.171,1.246 -1.133,1.246 -1.133,1.267 -1.171,1.267
  Top Layer region: -1.163,1.259 -1.142,1.259 -1.142,1.283 -1.163,1.283
  Top Layer region: -1.157,1.276 -1.146,1.276 -1.146,1.305 -1.157,1.305
  Top Layer lines w0.01: 1.35,1.35 0.975,1.35 0.325,1.35 -0.326,1.35 -0.975,1.35 -1.15,1.35 cw(c-1.35,1.35) -1.35,1.15 -1.35,-0.975 -1.35,-1.35 -0.975,-1.35 1.35,-1.35 1.35,1.35
SAW_package [mm]
  rect 0.6x1.75 smd: 1(1.2,0.875)
  rect 0.6x1 smd: 2(0,1.25) 2(0,1.25) 3(-1.2,1.25) 4(-1.2,-1.25) 5(0,-1.25) 6(1.2,-1.25)
  silkscreen extent -1.75,-2 1.75,2
"smd C0402" [mm] "Chip Capacitor; Body 1.0 x 0.5 mm (LxW typ)"
  rect 0.9x0.7 smd: 1(-0.65,0) 2(0.65,0)
  silkscreen extent -1.4,-0.25 -1.4,0.25
"smd C0402_0.35" [mm] "Chip Capacitor; Body 1.0 x 0.5 mm (LxW typ)"
  rect 0.9x0.7 smd: 1(-0.65,0) 2(0.65,0)
  silkscreen extent -1.4,-0.25 -1.4,0.25
"smd C0603" [mm] "Chip Capacitor; Body 1.6 x 0.8 mm (LxW typ)"
  rect 1.1x1 smd: 1(-0.85,0) 2(0.85,0)
  silkscreen extent -1.7,-0.4 -1.7,0.4
"smd C0603_0.45" [mm] "Chip Capacitor; Body 1.6 x 0.8 mm (LxW typ)"
  rect 1.1x1 smd: 1(-0.85,0) 2(0.85,0)
  silkscreen extent -1.7,-0.4 -1.7,0.4
"smd C0603_0.80" [mm] "Chip Capacitor; Body 1.6 x 0.8 mm (LxW typ)"
  rect 1.1x1 smd: 1(-0.85,0) 2(0.85,0)
  silkscreen extent -1.7,-0.4 -1.7,0.4
"smd C0805" [mm] "Chip Capacitor; Body 2.0 x 1.2 mm (LxW typ)"
  rect 1.3x1.5 smd: 1(-0.95,0) 2(0.95,0)
  silkscreen extent -1.9,-0.65 -1.9,0.65
"smd C0805_0.50" [mm] "Chip Capacitor; Body 2.0 x 1.2 mm (LxW typ)"
  rect 1.3x1.5 smd: 1(-0.95,0) 2(0.95,0)
  silkscreen extent -1.9,-0.65 -1.9,0.65
"smd C1206 polar" [mm] "Chip Capacitor; Body 3.2 x 1.6 mm (LxW typ)"
  round 0.5 on Top Overlay: 0(-1.5,-1.5)
  rect 1.6x1.8 smd: 1(-1.4,0) 2(1.4,0)
  silkscreen extent -0.3,-0.8 0.3,0.8
"smd KTL 5x3.2" [mm] "smd Kristal 5x3.2mm"
  oct 2x1.2 smd: 1(0,0)
  rect 2x1.2 smd: 2(3.7,0) 3(3.7,2.2) 4(0,2.2)
  silkscreen extent -0.65,-1.7 4.35,2.7
"smd MSOP/8" [mil]
  rect 15x45 smd: 1(-38.39,-86.61) 2(-12.79,-86.61) 3(12.81,-86.61) 4(38.41,-86.61) 5(38.39,86.61) 6(12.79,86.61) 7(-12.81,86.61) 8(-38.41,86.61)
  silkscreen extent -60,-59 60,61
"smd R EXB38v" [mm] "Panasonic EXB38V resistor network 0603"
  rect 0.65x0.7 smd: 1(-1.2,-0.8) 2(-1.2,0.8) 7(1.2,-0.8) 8(1.2,0.8)
  rect 0.45x0.7 smd: 3(-0.4,-0.8) 4(-0.4,0.8) 5(0.4,-0.8) 6(0.4,0.8)
  silkscreen extent -1.73,-0.4 1.73,0.4
"smd SOT-23" [mil]
  rect 40x40 smd paste+0 mask+0: 1(-38,-44) 2(38,-44) 3(-1,44)
  silkscreen extent -58,-20 58,26
"smd SOT-457" [mm]
  rect 0.5x0.7 smd: 1(-0.95,-1.325) 2(0,-1.325) 3(0.95,-1.325) 4(0.95,1.325) 5(0,1.325) 6(-0.95,1.325)
  round 0.5 on Top Overlay: 7(-1,-0.25)
  silkscreen extent -1.5,-0.75 1.5,0.75
"SMD USB MOLEX" [mm] "47589-0001 Molex MICRO USB TYPE AB"
  rect 1.5x0.4 smd: 1(4.2,1.3) 2(4.2,0.65) 3(4.2,0) 4(4.2,-0.65) 5(4.2,-1.3)
  rrect50% 1.9x1.25 hole 0.83 slot 1.5 at 0 deg unplated: 6(1.27,-4.09) 6(1.27,4.09)
  rect 1.9x1.075 smd: 6(1.27,-3.137) 6(1.27,3.137)
  rect 1.8x1.8 smd: 6(1.45,-1.15) 6(1.45,1.15)
  round 1.05 hole 0.65 unplated: 6(4.45,-2.225) 6(4.45,2.225)
  silkscreen extent -0.71,-3.75 5.09,3.75
SOIC127P600X175-8N [mm] "SOIC, 8-Leads, Body 4,9x4,0mm (max), Pitch 1,27mm, IPC Medium Density"
  oval 1.75x0.6 smd: 1(-2.625,1.905) 2(-2.625,0.635) 3(-2.625,-0.635) 4(-2.625,-1.905) 5(2.625,-1.905) 6(2.625,-0.635) 7(2.625,0.635) 8(2.625,1.905)
  silkscreen extent -2.75,-2.45 1.35,2.88, body extent -1.97,-2.47 1.97,2.47, height 1.75
SOT95P230X110-3N [mm] "SOT23, 3-Leads, Body 3,0x2,5mm (max), Pitch 0,95mm, IPC Medium Density"
  rect 1.4x0.6 smd: 1(-0.95,0.95) 2(-0.95,-0.95) 3(0.95,0)
  silkscreen extent -1.07,-1.5 0.7,1.93, body extent -0.7,-1.5 0.7,1.5, height 1.1
SOT223 [mil]
  rect 59x79 smd: 1(-91,-107) 2(0,-107) 3(91,-107)
  rect 150x79 smd: 4(0,141)
  silkscreen extent -141,-161 143,200, body extent -131,-105 135,162, height 51
TSQFP50P900X900X160-48N [mm] "TSQFP, 48-Leads, Body 9,2x9,2mm (max), Pitch 0,50mm, IPC Medium Density"
  oval 1.75x0.3 smd: 1(-4.075,2.75) 2(-4.075,2.25) 3(-4.075,1.75) 4(-4.075,1.25) 5(-4.075,0.75) 6(-4.075,0.25) 7(-4.075,-0.25) 8(-4.075,-0.75) 9(-4.075,-1.25) 10(-4.075,-1.75) 11(-4.075,-2.25) 12(-4.075,-2.75) 25(4.075,-2.75) 26(4.075,-2.25) 27(4.075,-1.75) 28(4.075,-1.25) 29(4.075,-0.75) 30(4.075,-0.25) 31(4.075,0.25) 32(4.075,0.75) 33(4.075,1.25) 34(4.075,1.75) 35(4.075,2.25) 36(4.075,2.75)
  oval 0.3x1.75 smd: 13(-2.75,-4.075) 14(-2.25,-4.075) 15(-1.75,-4.075) 16(-1.25,-4.075) 17(-0.75,-4.075) 18(-0.25,-4.075) 19(0.25,-4.075) 20(0.75,-4.075) 21(1.25,-4.075) 22(1.75,-4.075) 23(2.25,-4.075) 24(2.75,-4.075) 37(2.75,4.075) 38(2.25,4.075) 39(1.75,4.075) 40(1.25,4.075) 41(0.75,4.075) 42(0.25,4.075) 43(-0.25,4.075) 44(-0.75,4.075) 45(-1.25,4.075) 46(-1.75,4.075) 47(-2.25,4.075) 48(-2.75,4.075)
  silkscreen extent -4.2,-2.8 2.8,3.62, body extent -3.5,-3.5 3.5,3.5, height 1.6
X1G004691000112 [mm]
  rrect50% 0.8x0.6 smd: 1(-0.825,-0.565) 2(0.825,-0.565) 3(0.825,0.565) 4(-0.825,0.565)
  silkscreen extent -1.65,-1.7 1.65,1.7

## Part data
BAT1: library part NX3008NBK
C01 C02 C03 C06 C09 C10 C12 C13 C14 C15 C24 C28 C29 C30 C58: library part CSMD603/100nF, "smd capaciteit, verp.0603, 100nF", Component Type=Standard, Part Number=CSMD603/100nF, Pin Count=2, Supplier 1=Farnell
  C01 C02 C03 C06 C09 C10 C12 C13 C14 C15 C28 C29 C30 C58: Designator=CSMD603/100nF
C04 C05 C66 C68: library part CSMD603/10pF, "smd capaciteit, verp.0603, 10pF", Component Type=Standard, Part Number=CSMD603/10pF, Pin Count=2, Supplier 1=Farnell
  C04 C05 C66: Designator=CSMD603/10pF
C07 C08: library part CSMD1206/10uF/10V, "smd capaciteit, tantalium, verp.1206, 10uF/10V", Component Type=Standard, Designator=CSMD1206/10uF/10V, Part Number=CSMD1206/10uF/10V, Pin Count=2, Supplier 1=Farnell
C11 C57 C61 C62 C63: library part CSMD603/10nF, "smd capaciteit, verp.0603, 10nF", Component Type=Standard, Part Number=CSMD603/10nF, Pin Count=2, Supplier 1=Farnell
C16 C17 C18 C19: library part CSMD402/10nF, "smd capaciteit, verp.0402, 10nF", Component Type=Standard, Part Number=CSMD402/10nF, Pin Count=2, Supplier 1=Farnell
C20 C21 C22 C47 C50: library part CSMD603/1uF, "smd capaciteit, verp.0603, 1uF", Part Number=CSMD603/18nF, Component Type=Standard, Pin Count=2
  C20 C21 C22: Designator=CSMD603/18nF
  C47: Designator=CSMD603/18nF, Supplier 1=Farnell
  C50: Supplier 1=Farnell
C23: library part CSMD603/12nF, "smd capaciteit, verp.0603, 12nF", Component Type=Standard, Designator=CSMD603/12nF, Part Number=CSMD603/12nF, Pin Count=2
C25: library part CSMD603/820pF, "smd capaciteit, verp.0603, 820pF", Component Type=Standard, Part Number=CSMD603/820pF, Pin Count=2, Supplier 1=Farnell
C26 C27 C31 C35 C36 C37: library part CSMD402/22pF, "smd capaciteit, verp.0402, 22pF", Component Type=Standard, Part Number=CSMD402/22pF, Pin Count=2, Supplier 1=Farnell
  C26 C27 C31 C35: Designator=CSMD402/22pF
C32: library part CSMD402/1pF, "smd capaciteit, verp.0402, 1pF", Part Number=CSMD402/100nF, Component Type=Standard, Pin Count=2, Supplier 1=Farnell
C33: "smd capaciteit, verp.0402, 1nF", Component Type=Standard, Designator=CSMD402/1nF, Part Number=CSMD402/1nF, Pin Count=2, Supplier 1=Farnell
C34 C38 C41: library part CSMD402/100nF, "smd capaciteit, verp.0402, 100nF", Component Type=Standard, Part Number=CSMD402/100nF, Pin Count=2, Supplier 1=Farnell
C39 C67: library part CSMD402/47pF, "smd capaciteit, verp.0402, 47pF", Component Type=Standard, Part Number=CSMD402/47pF, Pin Count=2, Supplier 1=Farnell
C40: library part CSMD402/100nF, "smd capaciteit, verp.0402, 10nF", Component Type=Standard, Designator=CSMD402/100nF, Part Number=CSMD402/100nF, Pin Count=2, Supplier 1=Farnell
C42 C53 C54 C55 C56: library part CSMD402/100pF, "smd capaciteit, verp.0402, 100pF", Component Type=Standard, Part Number=CSMD402/100pF, Pin Count=2, Supplier 1=Farnell
C43 C44 C51 C52: "smd capaciteit, verp.0402, 100nF", Component Type=Standard, Part Number=CSMD402/100nF, Pin Count=2, Supplier 1=Farnell
  C43 C44: Designator=CSMD402/100nF
C45 C48: "smd capaciteit, verp.0402, 100pF", Component Type=Standard, Part Number=CSMD402/100pF, Pin Count=2, Supplier 1=Farnell
  C45: Designator=CSMD402/100pF
C46 C49: "smd capaciteit, verp.0402, 1.5nF", Component Type=Standard, Part Number=CSMD402/1.5nF, Pin Count=2, Supplier 1=Farnell
  C46: Designator=CSMD402/1.5nF
C59 C60 C64 C65: library part CSMD603/47pF, "smd capaciteit, verp.0603, 47pF", Component Type=Standard, Part Number=CSMD603/47pF, Pin Count=2, Supplier 1=Farnell
GPS1: library part "CON HDR 2x4", "pcb header recht 2x4  pitch 100mil", Component Type=Standard, Designator="CON HDR 2x4", Part Number="CON HDR 2x4", Pin Count=8, Supplier 1=Farnell
HIGH LOW MID SDR TEST_IN TEST_OUT: library part CMP-204357-000001-1, "CONN SMA JACK STR EDGE MNT", Frequency=18GHz, Manufacturer="RF Solutions Ltd.", Package=CONN_JACK, Automotive=No, Category=Conn, ComponentLink2Description=Datasheet, ComponentLink2URL=https://www.rfsolutions.co.uk/downloads/1498648656DS-CON-EDGE-SMA-4.pdf, Conn Orientation="Right Angle", Contact Material=Gold, Device Class L1=Connectors, Device Class L2="RF / Coaxial Connectors", Device Class L3=unset, Digikey Description="CONN SMA JACK STR EDGE MNT", Footprint Url=https://forum.upverter.com/uploads/default/original/3X/b/e/be75b907af57498775929d6d9099689c472e0307.pdf, Height=6.35mm, Impedance=50Ω, Is Female=yes, Lead Free=Yes, Manufacturer part number=CON-SMA-EDGE-S, Number Of Contacts=1, Octopart=https://octopart.com/con-sma-edge-s-rf+solutions-70967450, RoHS=TRUE, Shielding=true
JUSB: "MOLEX - 47589-0001 - MICRO USB TYPE AB", Supplier 1=Farnell
L01 L5: library part "Ferrite 0805", "Ferrite bead, 0805 package", Supplier 1=Farnell
L3 L4: "smd spoel, verpakking 805, 470nH", Supplier 1=Farnell
L6 L7 L8 L9 L10: library part SPL805/470nH, "smd spoel, verpakking 805, 470nH", Supplier 1=Farnell
LOCK: "led smd groen, Avago Techn., HSMG-C190", Supplier 1=Farnell
MIX: "led smd geel, Avago Techn., HSMY-C190", Supplier 1=Farnell
R01 R05: library part 1K5/603, "weerstand SMD603, 1K5", Supplier 1=Farnell
R02 R03 R04: library part 750R/603, "weerstand SMD603, 750R", Supplier 1=Farnell
R06 R07 R26 R27 R28: library part 51R/603, "weerstand SMD603, 51R", Supplier 1=Farnell
R08: library part 5K1/603, "weerstand SMD603, 5K1"
R09 R11: library part 270R/805, "weerstand SMD805, 270R"
R10: library part 22R/Network4/603, "weerstandsnetwerk SMD603, 4x 22R", Supplier 1=Farnell
R12 R13 R14: "weerstand SMD402, 50R", Supplier 1=Farnell
R15: library part 240K/603, "weerstand SMD603, 240K"
R16: library part 30R/603, "weerstand SMD603, 30R", Supplier 1=Farnell
R17: library part 91R/603, "weerstand SMD603, 91R", Supplier 1=Farnell
R18 R19: library part 1K8/805, "weerstand SMD805, 1K8"
R20: "weerstand SMD402, 20R", Supplier 1=Farnell
R21 R22 R23: library part 51R/402, "weerstand SMD402, 51R", Supplier 1=Farnell
R24 R25: library part 10K/603, "weerstand SMD603, 10K", Supplier 1=Farnell
R36HF: library part 390R/603, "weerstand SMD603, 390R", Supplier 1=Farnell
SAW1: "Saw Filter", Manufacturer=TDK, Manufacturer part number=B39162B3522U410
T2HF: "PNP transistor, smd", Supplier 1=Farnell
U1: library part STM32F100xx
U2: "Dual USB 2.0 integrated ESD protection", Supplier 1=Farnell
U5: "±0.25°C Typical Accuracy Digital Temperature Sensor", Supplier 1=Farnell
U6: "RF Amplifier", Manufacturer=rfmd/Qorvo, MPN=SBB3089ZSR
U7: "SPDT-J2/J1 to RFC", Manufacturer=Skyworks
U9 U10: "Gain block", Manufacturer="Analog Devices", Manufacturer part number=ADL5602ARKZ-R7
USB: "led smd rood, Avago Techn., HSMH-C190", Supplier 1=Farnell
X1: library part "KTL/5x3.2mm 16MHz", "TXC Xtal 16.000 MHz, 5x3.2mm", Component Type=Standard, Designator="KTL/5x3.2mm 16MHz", Part Number="KTL/5x3.2mm 16MHz", Pin Count=4, Supplier 1=Farnell
L2: Supplier 1=Farnell

## Via types
v1: diameter 0.8, hole 0.4, Top Layer to Bottom Layer, 595 vias
v2: diameter 0.61, hole 0.3, Top Layer to Bottom Layer, 55 vias
v3: diameter 0.6, hole 0.3, Top Layer to Bottom Layer, 16 vias
v4: diameter 0.66, hole 0.33, Top Layer to Bottom Layer, tented top, 11 vias
v5: diameter 1.27, hole 0.711, Top Layer to Bottom Layer, 10 vias
v6: diameter 0.7, hole 0.4, Top Layer to Bottom Layer, 1 vias

## Nets (pads, with @x,y where several pads share a name; then routed paths per layer and width w, separated by ;. In a path a pad name is that pad's centre, name@x,y a point inside that pad or via, vN(x,y) a via of type N, cw(c..) or ccw(c..) an arc to the next point about the centre after c; other vN are vias at no path point)
3V3: C01.2 C02.2 C03.2 C10.2 C11.2 C12.2 C13.2 C14.2 C15.2 C16.2 C17.2 C18.2 C19.2 C28.2 C29.2 C40.2 C41.2 L01.2 R02.2 R03.2 R04.2 R12.2 R13.2 R18.2 R19.1 U1.1 U1.9 U1.24 U1.36 U1.48 U4.6 U4.10 U4.16 U4.17 U4.26 U4.28 U4.32 U5.8 U8.9 X2.4 | length 78.6
  Top Layer w0.2: v3(41.3,60.789) v3@41.358,60.731 ; C14.2@42.736,59.531 42.736,58.331 43.286,58.331 43.594,58.639 ; U4.17@44.475,58.639 43.594,58.639 ; U4.16@45.25,59.414 43.969,59.414 43.686,59.131 43.686,58.731 43.594,58.639 ; U4.26@45.75,54.364 45.75,53.889 46.6,53.039 46.9,53.039 C19.2@46.986,52.953 ; v3(45.786,51.581) 45.886,51.581 C19.2@46.986,52.681 C19.2@46.986,52.953 ; U4.28@46.75,54.364 46.75,53.767 46.986,53.531 C19.2@46.986,52.953 ; U4.10@48.25,59.414 48.25,59.789 49.142,60.681 C15.2@49.386,60.681 49.4,60.681 50.2,61.481 v3(50.186,61.495) ; U4.32@48.75,54.364 C16.2@48.75,52.789 48.978,52.789 49.486,52.281 ; U4.6@49.525,57.639 50.85,57.639 C17.2@51.1,57.389 52.036,56.453 v3(52.036,56.231) ; v3(49.986,52.203) C12.2@50,52.189
  Top Layer w0.22: v1(13.8,43.839) 13.85,43.889 C03.2@13.85,45.389 C01.2@13.85,47.239 13.9,47.239 14.29,47.629 14.29,47.679 15.16,48.549 15.174,48.549 15.214,48.589 U1.36@15.961,48.589
  Top Layer w0.35: 17.286,53.847 U1.24@17.286,55.414 ; 22.5,52.589 U1.9@24.111,52.589
  Top Layer w0.4: U1.36@15.961,48.589 16.893,48.589 17.65,49.346 17.65,49.868 18.921,51.139 v5(19.994,51.139) 17.286,53.847 ; 22.676,48.589 U1.1@24.111,48.589 ; 23.371,47.264 U1.48@22.786,47.264 ccw(c23.161,47.264) 23.161,46.889 23.85,46.889
  Top Layer w0.5: C41.2@38.26,60.479 38.3,60.52 38.3,60.62 38.4,60.72 38.5,60.72 38.569,60.789 v3(41.3,60.789) 41.75,60.789 41.786,60.825 U8.9@41.786,64.754 ; v3@41.358,60.731 R12.2@42.336,60.731 42.55,60.517 42.55,59.717 C14.2@42.736,59.531 ; v1(45.2,64.039) 46.1,64.039 R13.2@46.15,63.989
  Top Layer w0.8: v5(15.61,37.435) R02.2@17.654,37.435 R03.2@19.254,37.435 R04.2@20.854,37.435 v5(22.45,37.435) ; v5(19.994,51.139) v5@20.121,51.139 ; 22.5,52.589 21.05,51.139 v5@20.121,51.139 ; 23.131,47.608 22.986,47.753 22.986,48.279 22.676,48.589 20.361,50.904 20.356,50.904 v5@20.121,51.139 ; 23.371,47.264 ccw(c23.371,47.316) 23.423,47.316 23.85,46.889 24.767,45.972 C02.2@24.734,45.689 ; R18.2@31.529,43.557 31.525,43.555 31.5,43.539 31.603,43.535 33.05,43.485 ; v1(32.9,44.439) 33.05,43.485 ; R19.1@34.4,43.439 33.05,43.485 ; C18.2@40.448,41.298 40.448,39.905 40.899,39.905 41.165,39.639 v5@43.85,39.639 ; C10.2@47.673,39.689 47.673,39.639 47.773,39.539 C10.2@47.823,39.539
  Bottom Layer w0.22: v1(13.8,43.839) v1@13.8,43.864
  other v3: 41.842,61.447 41.8,64.204
  other v5: 43.35,39.439 45.35,39.439 41.4,41.039 43.3,41.139 45.35,41.139
3V3RF_L01CPU: C08.1 C09.2 L01.1 U3.2 U3.4 | length 11.6
  Top Layer w0.4: L01.1@49.55,40.789 49.55,40.889 50,41.339 L01.1@50,41.639
  Top Layer w1.5: L01.1@50,41.639 50.81,42.449 U3.2@53.932,42.449
  Top Layer w2: U3.2@53.932,42.449 U3.4@60.231,42.449
5V: C07.1 C38.2 C39.2 C45.1 C46.1 C47.2 C48.1 C49.1 C50.2 GPS1.2 JUSB.1 L3.2 L4.2 R20.1 T2HF.2 U2.5 U3.3 U7.1 | length 197.3
  Top Layer w0.22: JUSB.1@4.8,53.639 5.893,53.639 6.043,53.789 v1(6.2,53.789) ; U2.5@6.915,52.089 v1(8,52.089)
  Top Layer w0.3: v1@38.6,62.954 v1(38.6,63.089) 38.694,63.183 38.694,64.739 U7.1@38.787,64.739
  Top Layer w0.6: C39.2@36.902,62.691 38.235,62.691 38.495,62.951 38.597,62.951 v1@38.6,62.954 ; T2HF.2@45.704,92.096 46.296,92.689 v1(47.45,92.689)
  Top Layer w0.7: C50.2@27.95,73.476 29.5,73.476 C38.2@29.5,73.439
  Top Layer w1: L4.2@23.259,75.039 23.23,75.009 23.23,73.769 v5(23.2,73.739) v5@23.345,73.594 ; v5@23.389,73.639 v5@23.345,73.594 ; v5@23.5,73.439 v5@23.463,73.476 ; R20.1@25.06,68.764 25.06,71.768 23.289,73.539 v5@23.345,73.594 ; GPS1.2@25.09,33.619 25.09,32.098 25.536,31.651 45.212,31.651 53.213,39.652 54.418,39.652 v1(53.932,40.138) ; C50.2@27.95,73.476 v5@23.463,73.476 ; L3.2@54.15,66.039 L3.2@54.3,65.889 ; L3.2@54.2,65.839 L3.2@54.3,65.839 ; v5@23.345,73.594 v5@23.463,73.476 ; v1(53.932,40.138) 53.932,40.088 53.683,39.839 53.683,40.387 v1(53.932,40.138)
  Bottom Layer w1: v1(8,52.089) 6.875,52.089 6.225,52.739 ; GPS1.2@25.09,33.619 14.62,33.619 9.525,38.714 6.225,42.014 6.225,52.739 ; 31.7,82.15 23.245,73.694 6.225,56.675 6.225,53.814 v1(6.2,53.789) 6.225,53.764 6.225,52.739 ; 31.95,82.4 42.239,92.689 v1(47.45,92.689) ; v1(38.6,63.089) 38.6,63.403 41.376,66.179 42.16,66.179 42.275,66.063 v1(51.55,66.063) 57.2,60.413 57.2,51.689 55.75,50.239 55.75,49.395 53.932,47.578 v1(53.932,40.138)
BAND_SEL: U1.12 U7.2 | length 22.4
  Top Layer w0.22: U1.12@24.111,54.089 24.425,54.089 24.462,54.126 24.462,54.44 26.35,56.328 26.35,56.639 26.71,56.999 29.344,56.999 30.134,57.789 33.032,57.789 36.492,61.249 37.595,61.249 38.212,61.866 38.212,61.877 38.727,62.391 38.835,62.391 39.7,63.256 39.7,64.639 38.989,65.35 38.827,65.35 U7.2@38.787,65.39
CE_U1: R10.8 U4.4 | length 7.8
  Top Layer w0.2: U4.4@49.525,56.639 50.201,56.639 50.836,56.004 50.836,54.281 51.336,53.781 53.408,53.781 54.4,52.789 R10.8@54.4,52.439
CLK_LED: U1.38 | length 0.9
  Top Layer w0.22: U1.38@17.696,46.427 17.786,46.517 U1.38@17.786,47.264
CPU_LOCK_LED: LOCK.2 U1.40 | length 3.9
  Top Layer w0.22: U1.40@18.786,47.264 18.786,46.517 18.876,46.427 18.876,46.323 19.254,45.945 LOCK.2@19.254,43.539
CPU_MIX_LED: MIX.2 U1.41 | length 4.4
  Top Layer w0.22: U1.41@19.286,47.264 19.286,46.517 19.376,46.427 19.376,46.346 19.624,46.098 19.624,46.074 19.7,45.998 19.7,45.086 20.8,43.986 MIX.2@20.8,43.489
CPU_OSC_IN: C04.2 U1.5 X1.3 | length 8.9
  Top Layer w0.2: X1.3@30,49.289 30.25,49.039 C04.2@30.25,47.1
  Top Layer w0.22: U1.5@24.111,50.589 29.261,50.589 30.045,49.805 X1.3@30.045,49.494
CPU_OSC_OUT: C05.2 U1.6 X1.1 | length 6.8
  Top Layer w0.2: U1.6@24.111,51.089 24.13,51.07 26.431,51.07 X1.1@28.2,52.839 ; X1.1@27.8,52.989 27.98,53.169 C05.2@27.98,54.839
CPU_RX: GPS1.8 U1.22 | length 27.9
  Top Layer w0.3: 18.286,53.972 U1.22@18.286,55.414
  Top Layer w0.4: 18.286,53.972 v1(19.45,52.808) ; v1(25.3,46.989) 27.23,45.059 v1(27.23,42.539)
  Bottom Layer w0.4: v1(19.45,52.808) 20.134,52.124 20.402,52.124 20.979,51.547 20.979,51.279 25.269,46.989 v1(25.3,46.989) ; v1(27.23,42.539) 27.23,41.094 27.7,40.624 31.282,37.042 31.282,35.047 GPS1.8@32.71,33.619
CPU_SCL: R18.1 U1.42 U5.2 | length 20
  Top Layer w0.22: U1.42@19.876,46.443 19.876,46.369 19.994,46.251 19.994,46.228 20.07,46.152 20.07,45.239 21.261,44.048 21.47,44.048 21.622,43.895 21.622,43.687 24.22,41.089 31.15,41.089 R18.1@31.6,41.539 31.7,41.539 32.24,40.999 32.24,40.899 33.975,39.164 U5.2@35.7,39.164
CPU_SDA: R19.2 U1.43 U5.1 | length 21
  Top Layer w0.22: U1.43@20.286,47.264 20.286,46.517 20.376,46.427 20.376,46.369 20.506,46.239 20.506,45.326 21.415,44.418 21.623,44.418 21.992,44.048 21.992,43.84 24.356,41.476 29.769,41.476 30.742,42.449 32.458,42.449 33.368,41.539 R19.2@34.4,41.539 34.94,40.999 34.94,39.955 35.081,39.814 U5.1@35.7,39.814
CPU_TX: GPS1.6 U1.21 | length 35.9
  Top Layer w0.3: U1.21@18.786,55.414 18.786,54.482 19.504,53.764
  Top Layer w0.4: 19.504,53.764 19.925,53.764 v1(20.4,53.289) ; v1(26,47.689) 26,47.589 27.98,45.609 v1(27.98,44.239) ; GPS1.6@30.17,33.619 GPS1.6@30.17,34.177
  Bottom Layer w0.4: v1(20.4,53.289) v1(26,47.689) ; v1(27.98,44.239) 34.65,37.569 34.65,32.639 33.6,31.589 32.2,31.589 GPS1.6@30.17,33.619